# EAGLE board untitled (EAGLE 9.4.2)
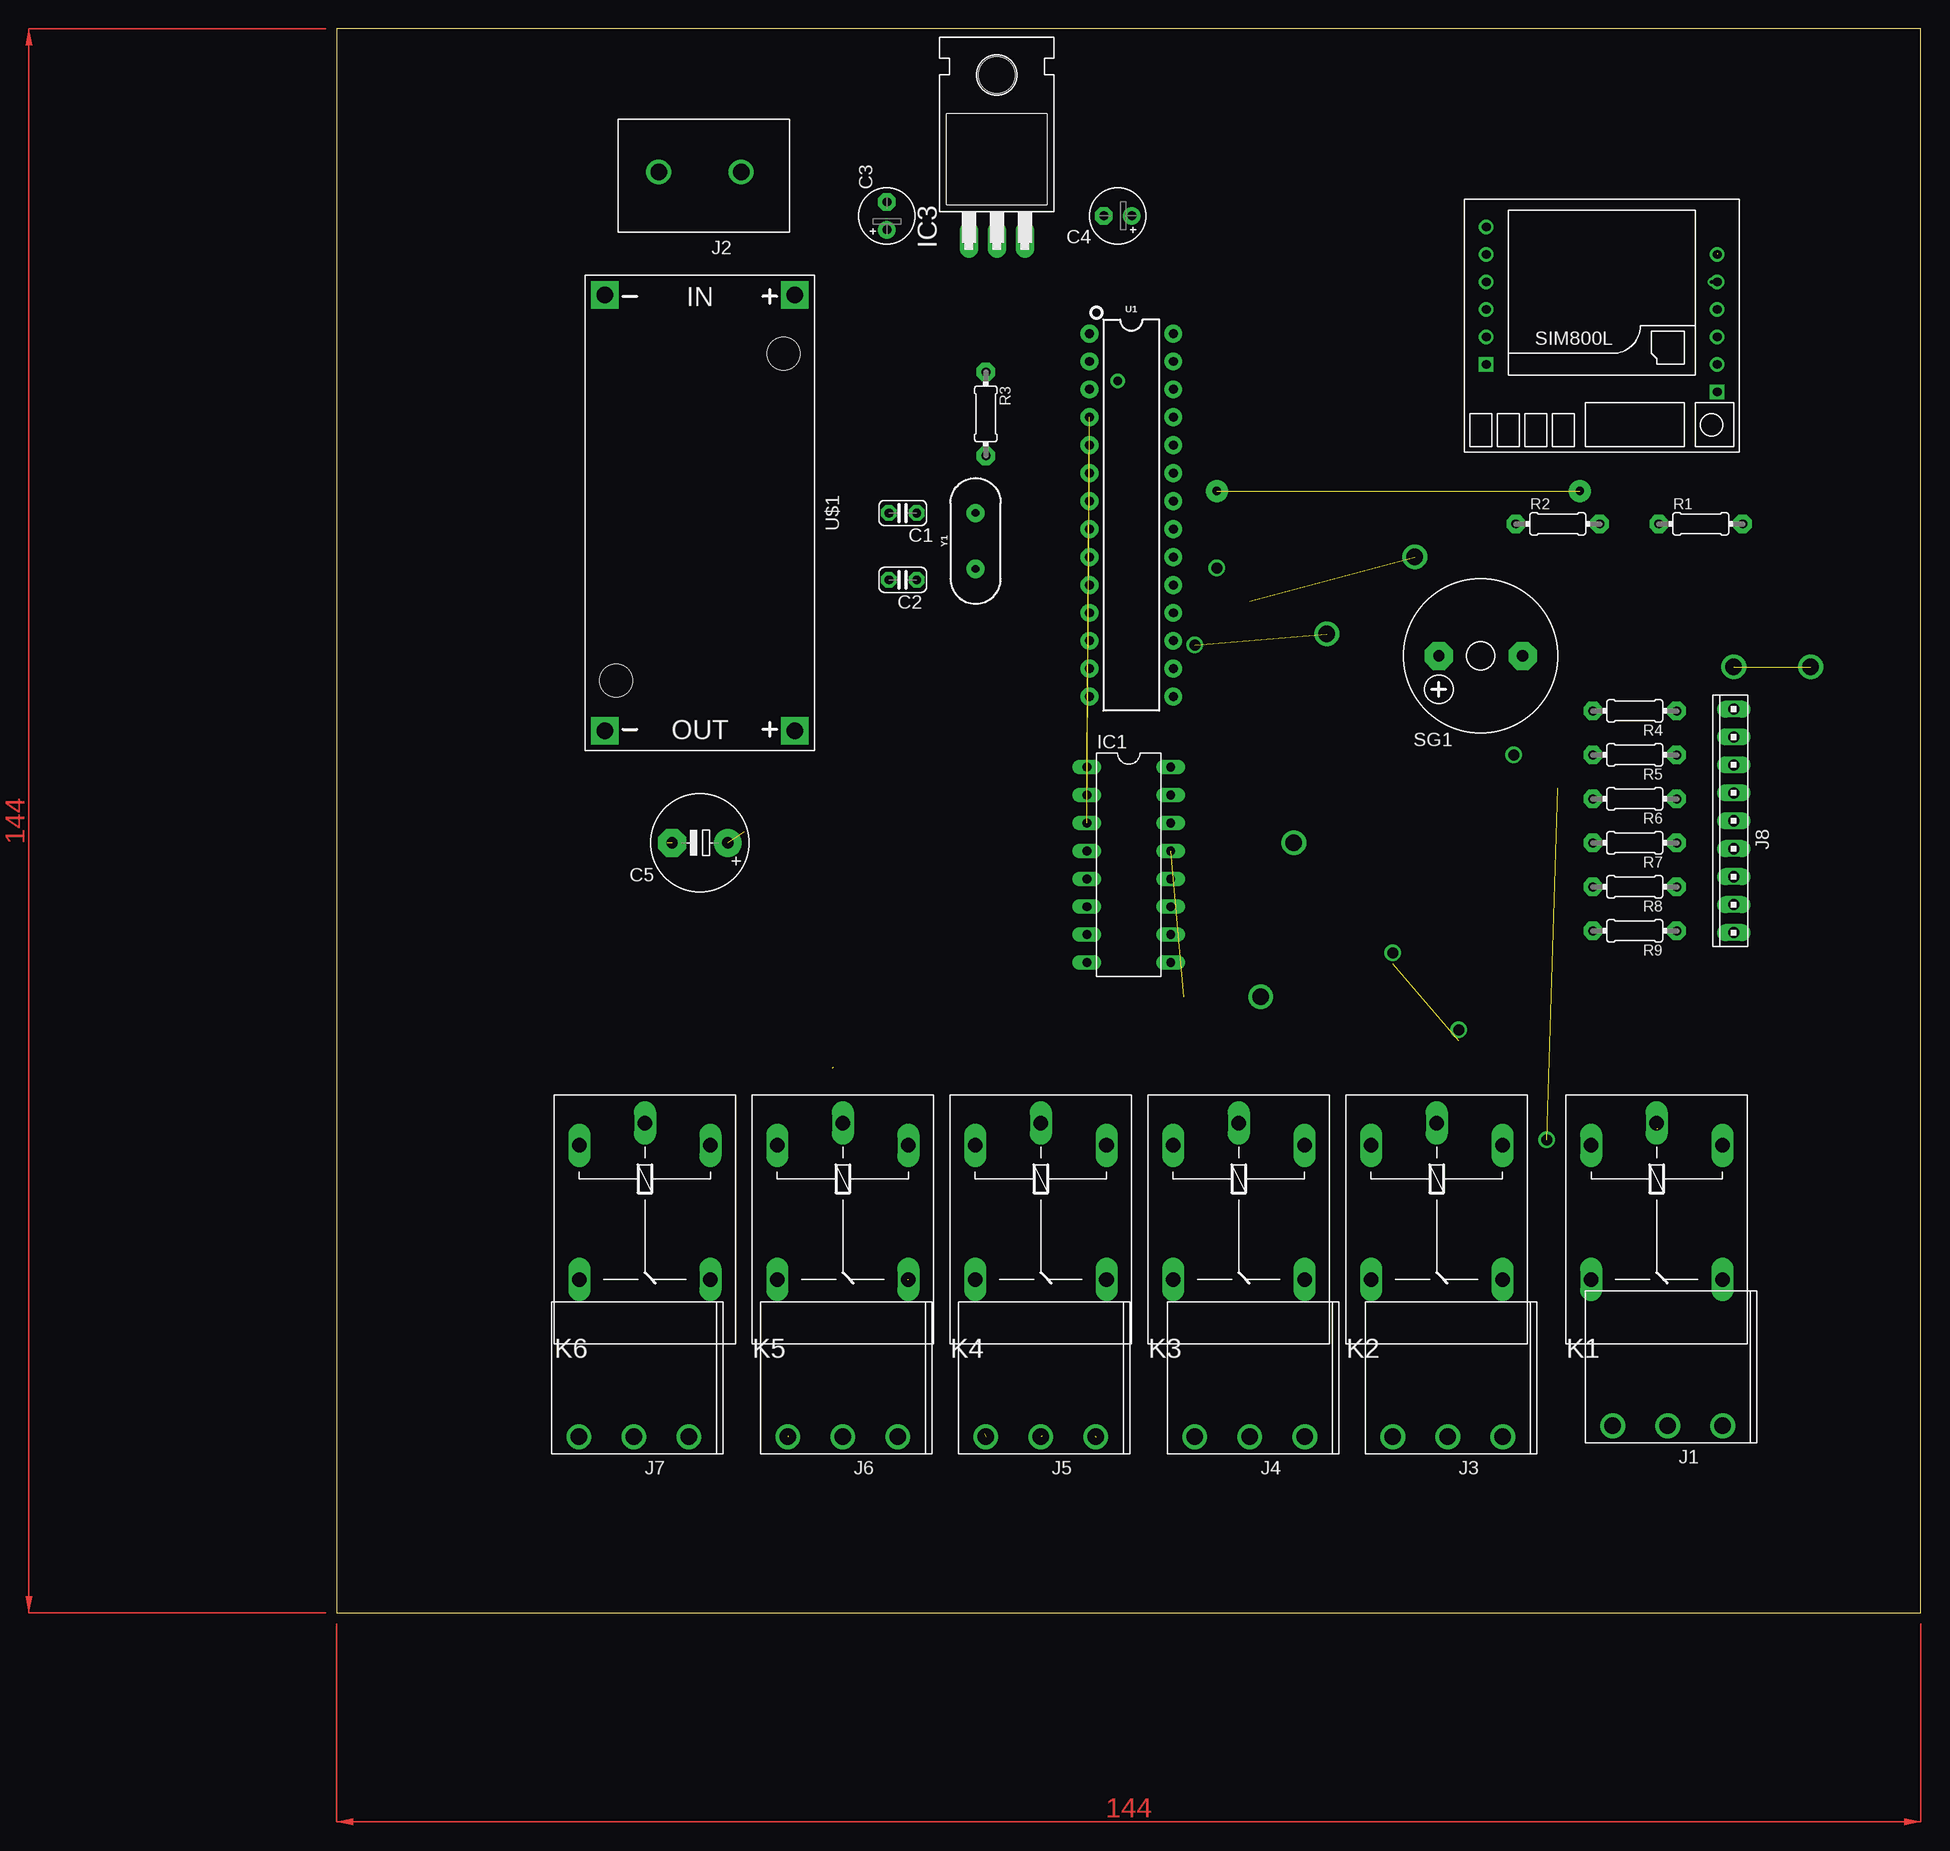
[diagram p0: board, top side]
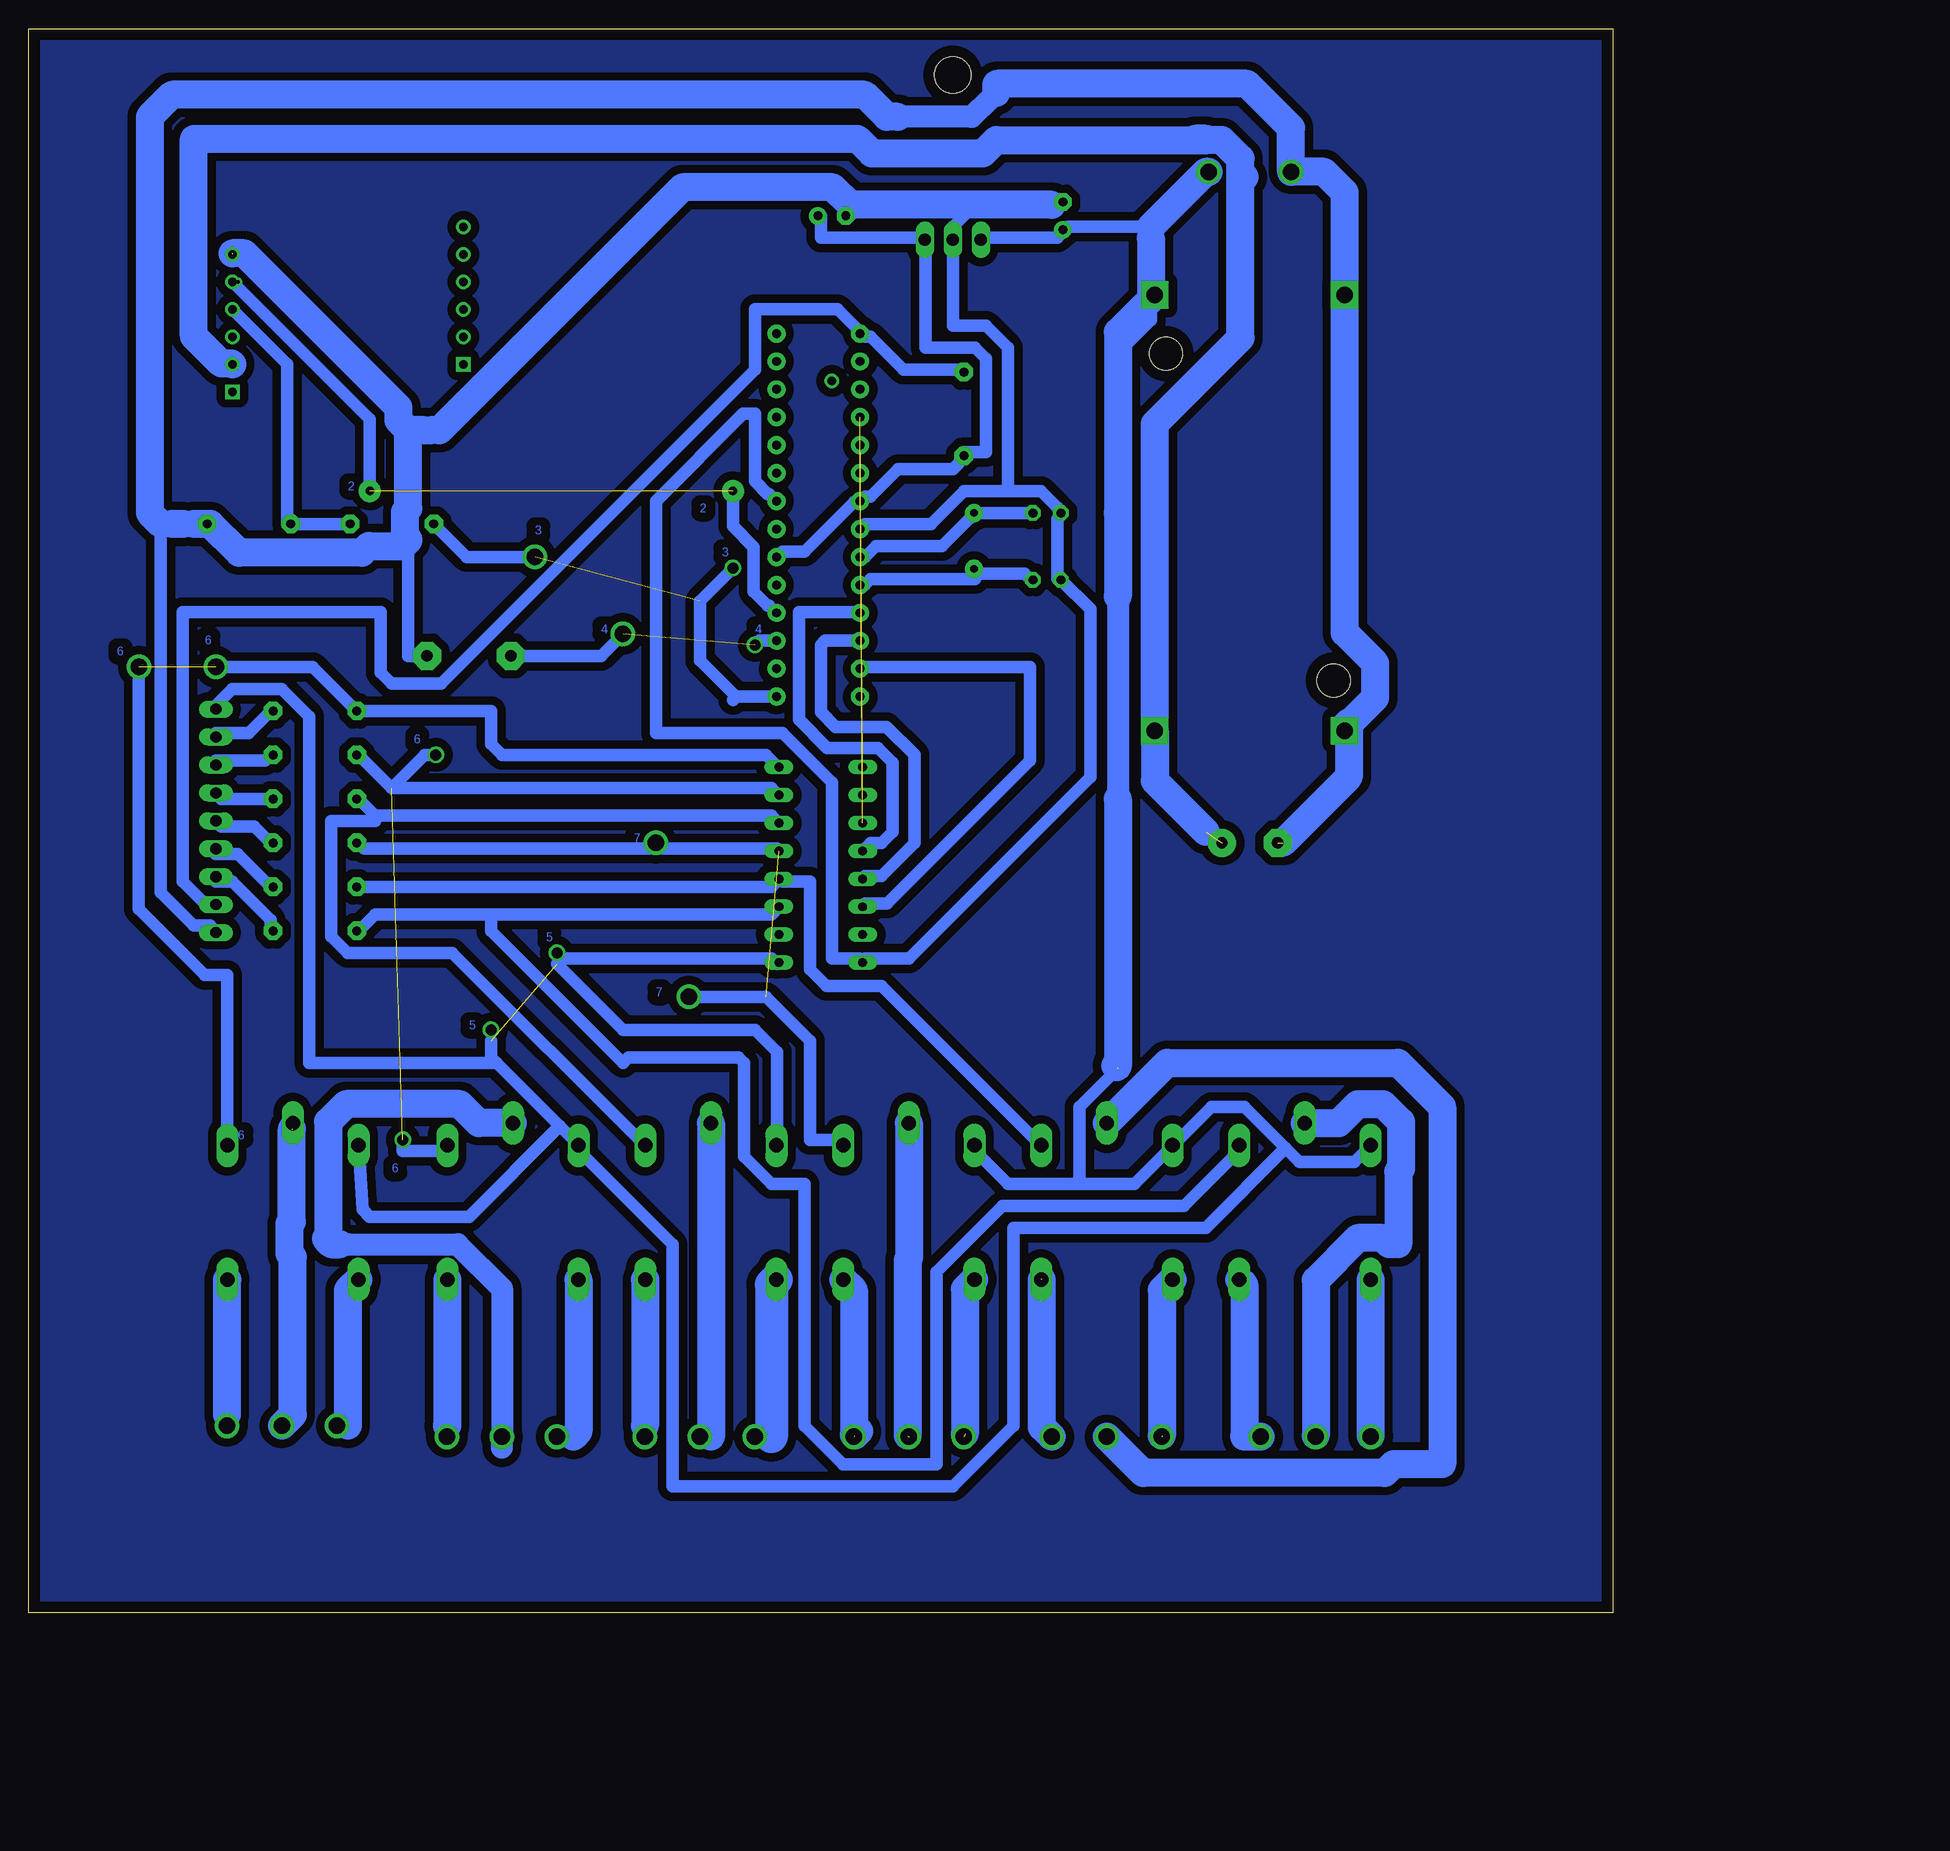
[diagram p1: board, bottom side, seen from below]

Size 144 x 144 mm. Coordinates in mm from the lower left corner, seen from the top.
Outline: 0,0 144,0 144,144 0,144 0,0
Copper layers (1*16): Top 0.035mm / dielectric 1.5mm / Bottom 0.035mm
Design rules "default *": minimum track width 45mil, minimum drill 0.35mm, track to track 30mil, track to pad 20mil, pad to pad 6mil, via to via 6mil, smd to smd 6mil, copper to edge 40mil, drill to drill 6mil, minimum pad ring 10mil, minimum via ring 8mil, stop-mask expansion 4mil, vias tented up to drill 0mil, thermal gap 10mil

## Footprints (pad centres in the part's own frame; a part is rotated, then mirrored left to right if it is on the bottom)
C025-024X044 = drill 0.813 pad 1.422 octagon: 1 -1.27,0; 2 1.27,0
E2,5-5 = drill 0.813 pad 1.6: + -1.27,0 | drill 0.813 pad 1.6 octagon: - 1.27,0
E5-8,5 = drill 1.016 pad 2.54: + -2.54,0 | drill 1.016 pad 2.54 octagon: - 2.54,0
DIL16 = drill 0.813 long: 1 -8.89,-3.81; 2 -6.35,-3.81; 3 -3.81,-3.81; 4 -1.27,-3.81; 5 1.27,-3.81; 6 3.81,-3.81; 7 6.35,-3.81; 8 8.89,-3.81; 9 8.89,3.81; 10 6.35,3.81; 11 3.81,3.81; 12 1.27,3.81; 13 -1.27,3.81; 14 -3.81,3.81; 15 -6.35,3.81; 16 -8.89,3.81
TO220H = drill 1.118 long: 1 -2.54,-10.16; 2 0,-10.16; 3 2.54,-10.16 | hole 3.302: 0,4.826
691216700003 = drill 1.5: 1 -5,0; 2 0,0; 3 5,0
691217910002 = drill 1.5: 1 -3.75,0; 2 3.75,0
10X09MTA = drill 1.016 long: 1 10.16,0; 2 7.62,0; 3 5.08,0; 4 2.54,0; 5 0,0; 6 -2.54,0; 7 -5.08,0; 8 -7.62,0; 9 -10.16,0
G5LE = drill 1.321 long: 1 -7.493,-5.969; 2 -7.493,5.969; O 4.699,5.969; P -9.525,0; S 4.699,-5.969
0204/7 = drill 0.813 pad 1.676 octagon: 1 -3.81,0; 2 3.81,0
F/CM12P = drill 1.016 pad 2.54 octagon: + 3.81,0; - -3.81,0
DIP28 = drill 0.813 pad 1.626: 1 -16.51,-3.81; 2 -13.97,-3.81; 3 -11.43,-3.81; 4 -8.89,-3.81; 5 -6.35,-3.81; 6 -3.81,-3.81; 7 -1.27,-3.81; 8 1.27,-3.81; 9 3.81,-3.81; 10 6.35,-3.81; 11 8.89,-3.81; 12 11.43,-3.81; 13 13.97,-3.81; 14 16.51,-3.81; 15 16.51,3.81; 16 13.97,3.81; 17 11.43,3.81; 18 8.89,3.81; 19 6.35,3.81; 20 3.81,3.81; 21 1.27,3.81; 22 -1.27,3.81; 23 -3.81,3.81; 24 -6.35,3.81; 25 -8.89,3.81; 26 -11.43,3.81; 27 -13.97,3.81; 28 -16.51,3.81
DC-DC-STEP-DOWN-LM2596 = drill 1.5 pad 2.5 square: IN+ -19.812,8.636; IN- -19.812,-8.636; OUT+ 19.812,8.636; OUT- 19.812,-8.636 | hole 3: -14.478,7.62; 15.24,-7.62
SIM800LMODULE = drill 0.8: DTR 10.5,1; GND -10.5,-6.5; MIC+ 10.5,-1.5; MIC- 10.5,-4; RST -10.5,1; RX -10.5,-1.5; SPK+ 10.5,-6.5; SPK- 10.5,-9; TX -10.5,-4; VCC -10.5,3.5 | drill 0.8 square: NET -10.5,6; RING 10.5,3.5
HC49US = drill 0.7 pad 1.651: 1 -2.54,0; 2 2.54,0

## Placement (x,y rotation side)
C1  [C025-024X044]  51.45,99.99 180 top
C2  [C025-024X044]  51.45,93.91 180 top
C3  [E2,5-5]  50,127 90 top
C4  [E2,5-5]  71,127 180 top
C5  [E5-8,5]  33,70 180 top
IC1  ULN2003AN  [DIL16]  72,68 270 top
IC3  7805T  [TO220H]  60,135 0 top
J1  [691216700003]  121,17 180 top
J2  [691217910002]  33,131 180 top
J3  [691216700003]  101,16 180 top
J4  [691216700003]  83,16 180 top
J5  [691216700003]  64,16 180 top
J6  [691216700003]  46,16 180 top
J7  [691216700003]  27,16 180 top
J8  [10X09MTA]  127,72 90 top
K1  G5L  [G5LE]  120,35 270 top
K2  G5L  [G5LE]  100,35 270 top
K3  G5L  [G5LE]  82,35 270 top
K4  G5L  [G5LE]  64,35 270 top
K5  G5L  [G5LE]  46,35 270 top
K6  G5L  [G5LE]  28,35 270 top
R1  [0204/7]  124,99 0 top
R2  [0204/7]  111,99 0 top
R3  [0204/7]  59,109 270 top
R4  [0204/7]  118,82 180 top
R5  [0204/7]  118,78 180 top
R6  [0204/7]  118,74 180 top
R7  [0204/7]  118,70 180 top
R8  [0204/7]  118,66 180 top
R9  [0204/7]  118,62 180 top
SG1  F/CM12P  [F/CM12P]  104,87 180 top
U1  328P  [DIP28]  72.23,99.8 270 top
U$1  DC-DC-STEP-DOWN-LM2596  [DC-DC-STEP-DOWN-LM2596]  33,100 270 top
U$2  SIM800LMODULE  [SIM800LMODULE]  115,117 180 top
Y1  16MHz  [HC49US]  58.07,97.45 90 top

## Library data of the parts
C1-C4 IC3 R1-R9 = adafruit
C5 = BeagleBone_Blue_R3
IC1 = uln-udn
J1-J7 = Wurth_Elektronik_Electromechanic_Terminal_Blocks_Connectors_rev19b
J8 = con-amp
K1-K6 = relay; OC_FARNELL: unknown; OC_NEWARK: unknown
SG1 = buzzer; OC_FARNELL: unknown; OC_NEWARK: unknown
U1 = SparkFun-IC-Microcontroller; PROD_ID: IC-09136
U$1 = diy-modules
U$2 = SIM800LMODULE
Y1 = SparkFun-Clocks; PROD_ID: XTAL-08181; SF_ID: COM-00536

## Nets
GND: C1.2 C2.2 C3.- C4.- C5.- IC1.8 IC3.2 J2.2 J8.9 R1.2 SG1.- U1.8 U1.22 U$1.IN- U$1.OUT- U$2.GND
N$1: IC1.1 U1.4
N$2: C2.1 U1.10 Y1.1
N$3: C1.1 U1.9 Y1.2
N$4: IC1.2 U1.5
N$5: IC1.3 U1.6
N$6: IC1.4 U1.11
N$7: IC1.5 U1.12
N$8: IC1.6 U1.13
N$10: IC1.15 K2.2 R5.2
N$11: C4.+ IC3.3 R3.2 U1.7 U1.20
N$12: J8.2 R4.1
N$13: IC1.14 K3.2 R6.2
N$14: IC1.13 K4.2 R7.2
N$15: C5.+ U$1.OUT+ U$2.VCC
N$16: U1.18 U$2.TX
N$17: R2.1 U1.15
N$18: R1.1 R2.2 U$2.RX
N$19: IC1.12 K5.2 R8.2
N$20: J1.2 K1.P
N$21: J1.3 K1.S
N$22: J1.1 K1.O
N$23: J8.3 R5.1
N$24: IC1.16 K1.2 R4.2
N$25: J3.2 K2.P
N$26: J3.3 K2.S
N$27: J3.1 K2.O
N$28: J8.8 R3.1 U1.1
N$29: J4.2 K3.P
N$30: J4.3 K3.S
N$31: J4.1 K3.O
N$32: SG1.+ U1.17
N$33: J5.2 K4.P
N$34: J5.3 K4.S
N$35: J5.1 K4.O
N$36: J8.4 R6.1
N$37: J6.2 K5.P
N$38: J6.3 K5.S
N$39: J6.1 K5.O
N$40: C3.+ IC1.9 IC3.1 J2.1 J8.1 K1.1 K2.1 K3.1 K4.1 K5.1 K6.1 U$1.IN+
N$41: J7.2 K6.P
N$42: J7.3 K6.S
N$43: J7.1 K6.O
N$45: J8.5 R7.1
N$46: J8.6 R8.1
N$47: J8.7 R9.1
N$64: IC1.11 K6.2 R9.2

## Tracks (layer width: path | path; a pad name or v marks a point on that pad's centre or on a via)
GND  (2 unrouted)
  Bottom 1.143: 58,128 51,128 50,128 C3.- | 58,128 60,126 IC3.2 60,117 57,117 55,115 55,102 | 68.75,127.75 68.5,128 58,128 | 68.75,127.75 69.5,127 C4.- | 55,102 52,102 50.5,100.5 C1.2 50.5,99.5 50.5,94 C2.2 47.5,91.23 47.5,76 64,59.5 68,59.5 IC1.8 68.5,59.5 71,59.5 71,75.5 75.5,80 87,80 87,101.07 79.07,109 78,109 78,102.89 76.82,101.72 76.69,101.72 U1.22 | 55,102 59,102 62,99 68,99 U1.8 | 24.5,120 U$1.IN- | 24.5,80 U$1.OUT- | 129,99 130,99 | 131,99 132,99 132,65.5 129,62.5 127.5,62.5 127,62 J8.9 | 109.5,97 109.5,87 SG1.- | 109.5,107.5 109.5,97 | 109.5,97 110,97 | 127.5,99 R1.2 | 69,128 68.75,127.75 | 107.5,107.5 108,107.5
  Bottom 1.27: 56.06,138.19 56.63,137.63
  Bottom 2: 56.63,137.63 58.26,136 65,136
  Bottom 2.54: 56.06,138.19 56.06,138.94 56,139 33.25,139 29.25,135 J2.2 26.25,131 24.36,129.11 U$1.IN- 24.36,89.1 21.59,86.33 21.59,83.19 24.36,80.42 U$1.OUT- 24.36,80.61 24,80.97 24,76 30,70 | 65,136 66,136 68,138 131,138 133,136 133,100 132,99 | 51,128 69,128 69.32,128 70.92,129.6 84.57,129.6 106.68,107.5 107.5,107.5 | 108,107.5 109.5,107.5 | 109.5,107.5 110.4,108.4 110.4,109.58 124.42,123.6 125.5,123.6 | 127.5,99 124.88,96.38 113.73,96.38 113.11,97 110,97 109.5,97.5 109.5,97.61 109.81,97.92 109.81,100.08 109.5,100.39 109.5,107.5 | 130,99 131,99 | R1.2 129,99
N$1  (1 unrouted)
N$2
  Bottom 1.143: 58,94.5 53.5,94.5 53,94 C2.1 | 58,94.5 Y1.1 | U1.10 68,93.5 67.5,94 58,94 58,94.5
N$3
  Bottom 1.143: C1.1 53,100 58,100 Y1.2 58.5,99.5 61,97 67,97 68,96 U1.9
N$4  (1 unrouted)
N$5  (1 unrouted)
N$6
  Bottom 1.143: IC1.4 68,69.5 67.5,70 66.5,70 65.5,71 65.5,77.32 66.81,78.63 71.44,78.63 74,81.19 74,91 68.51,91 U1.11
N$7
  Bottom 1.143: IC1.5 68,67 66.5,67 63.5,70 63.5,78.02 66.02,80.53 70.65,80.53 72,81.89 72,88 71.63,88.37 U1.12
N$8
  Bottom 1.143: IC1.6 68,64.5 66,64.5 53,77.5 53,86 68.25,86 U1.13
N$9  (via drill 0.75 pad 1.3)
  other vias: 71,112
N$10  (via drill 1)  (1 unrouted)
  Bottom 1.143: 111,75 76.5,75 76,74.5 IC1.15 | 111,75 114,78 R5.2 | 111,75 108,78 v107,78 | K2.2 106.46,42 110,42 v110,43
N$11
  Bottom 1.143: C4.+ 72,127 72,125 63,125 IC3.3 62.5,124.5 62.5,115 58,115 57,114 57,105.5 59,105.5 R3.2 59,105 60,104 65,104 67.5,101.5 68,101.5 U1.7 68.5,101 69,101 73.5,96.5 75.5,96.5 76,96 U1.20
N$12
  Bottom 1.143: J8.2 127,80 124,80 122,82 R4.1
N$13
  Bottom 1.143: IC1.14 76.5,72.5 112.5,72.5 | 112.5,72.5 114,74 R6.2 | K3.2 88,42.5 105.5,60 115,60 116.5,61.5 116.5,72 112.5,72 112.5,72.5
N$14  (via drill 1.5)  (1 unrouted)
  Bottom 1.143: IC1.13 76,69.5 113.5,69.5 114,70 R7.2 | K4.2 70.48,43 73,43 73,52 77,56 v84,56
N$15  (1 unrouted)
  Bottom 1.143: 35.5,70 C5.+
  Bottom 2.54: 33.85,130.93 33.85,115.9 41.64,108.11 U$1.OUT+ 41.64,75.64 37,71 | 33.46,130.54 33.85,130.93 | U$2.VCC 125.57,113.57 126.51,113.57 129,116.06 129,134 68.67,134 67.37,132.7 57.27,132.7 56.07,133.9 36.82,133.9 | 38,134 36.92,134 36.82,133.9 | 33.85,130.93 33.85,132.2 35.55,133.9 36.82,133.9
N$16  (via drill 0.75 pad 2)  (1 unrouted)
  Bottom 1.143: U1.18 76.69,91.56 76.82,91.56 78.09,92.83 78.09,96.91 80,98.81 v80,102 | U$2.TX 113,108.5 v113,102
N$17  (via drill 1, 1.5)  (1 unrouted)
  Bottom 1.143: U1.15 79.71,83.29 | 79.71,83.29 80,83 | 79.71,83.29 83,86.58 83,92 v80,95 | R2.1 104.19,96 v98,96
N$18
  Bottom 1.143: U$2.RX 120.5,113.5 120.5,99 R1.1 R2.2
N$19
  Bottom 1.143: R8.2 76.5,66 76,66.5 IC1.12 75.5,66.5 73,66.5 73,58.5 71.5,57 66.5,57 52,42.5 K5.2
N$20  (1 unrouted)
  Bottom 1.143: 120,44 K1.P
  Bottom 2.54: J1.2 120,18 120,32.33 120.3,32.63 120.3,35.37 120.1,35.57 120.1,44
N$21
  Bottom 1.143: 115,17 J1.3
  Bottom 2.54: K1.S 115,29.33 115,17
N$22
  Bottom 1.143: 126,18 J1.1
  Bottom 2.54: K1.O 126,30.27 126,18
N$23
  Bottom 1.143: J8.3 127,77.5 122.5,77.5 122,78 R5.1
N$24  (via drill 1, 1.5)  (1 unrouted)
  Bottom 1.143: IC1.16 76,77 77,78 101,78 102,79 102,82 R4.2 | 114,82 R4.2 | K1.2 125.97,57.97 126,58 128,58 134,64 v134,86 | R4.2 118.19,86 v127,86
N$25
  Bottom 1.143: 116.5,33.5 116.5,44 | 115,33.5 115.74,33.5
  Bottom 2: 115,33.5 105,33.5 101,29.5 J3.2 101,15
  Bottom 2.54: K2.P 103.09,44.52 104.82,46.25 115.18,46.25 116.8,44.63 116.8,34.2 117,34 116.5,33.5 115.74,33.5
N$26
  Bottom 1.143: 94.5,16 J3.3
  Bottom 2.54: K2.S 94.03,16.47 94.5,16
N$27
  Bottom 1.143: J3.1 106,17 106,30 K2.O
  Bottom 2.54: K2.O 105.97,17.03 106,17
N$28
  Bottom 1.143: J8.8 127,64.5 128,64.5 130,66.5 130,91 112,91 112,85.5 111,84.5 106.5,84.5 78,113 78,118.5 70.5,118.5 68.5,116.5 U1.1 68,116 67.5,116 64.5,113 59,113 R3.1
N$29
  Bottom 1.143: J4.2 82,16
  Bottom 2.54: K3.P 82,16
N$30
  Bottom 1.143: J4.3 76.5,16 76.5,30 K3.S
  Bottom 3: K3.S 76.5,29.83 76.5,16
N$31
  Bottom 1.143: J4.1 88,17 88,30 K3.O
  Bottom 2.54: K3.O 88,30.27 88,17
N$32  (via drill 1, 1.5)  (1 unrouted)
  Bottom 1.143: SG1.+ 92,87 v90,89 | U1.17 77.63,88.37 v78,88
N$33  (1 unrouted)
  Bottom 2.54: K4.P 64,32.18 64.1,32.08 64.1,16.1
N$34  (1 unrouted)
  Bottom 2.54: K4.S 58.9,29.44 58.9,16.29
N$35  (1 unrouted)
  Bottom 2.54: K4.O 69,29.33 69,16.18 68.92,16.1 68.51,16.51
N$36
  Bottom 1.143: R6.1 126.5,74 127,74.5 J8.4
N$37
  Bottom 1.143: 19.5,50 41,50 46,45 K5.P
  Bottom 2.54: K5.P 40.52,50 19.5,50 15.5,46 15.5,13.5 19.93,13.5 20.74,12.7 42.7,12.7 J6.2
N$38  (1 unrouted)
  Bottom 2.54: K5.S 41,29.33 41,16.1
N$39  (1 unrouted)
  Bottom 2.54: J6.1 51.9,16.9 51.9,30.3
N$40  (2 unrouted)
  Bottom 1.143: 101.5,50 118.5,50 118.5,81.5 121,84 125.5,84 127,82.5 J8.1 | 95.75,44.25 94,42.5 K2.1 94,42 85.5,33.5 85.5,11.5 60,11.5 54.5,17 54.5,35 37,35 29.75,42.25 | 95.75,44.25 101.5,50 | 95.75,44.25 104,36 113,36 113.67,36.66 K1.1 | IC3.1 57,125 50.5,125 50,125.5 C3.+ 49.5,126 42,126 42,125 42,120 U$1.IN+ 42,119.5 42,117.5 45,114.5 45,100 45,98 | IC1.9 76,59 76.5,59.5 95.5,59.5 96,59 90,53 78,53 76,51 76,42.5 K3.1 | 29.75,42.25 33.5,46 36.5,46 40,42.5 K5.1 40.5,42 43.5,39 48.5,39 | 29.75,42.25 28.5,41 23.5,41 22.5,42 K6.1 | 48.5,39 55,39 58,42 K4.1 58,43 | 45,49.5 48.5,46 48.5,39 | 101.5,50 102,50.5 102,52
  Bottom 2: 45,92.41 45,74
  Bottom 2.54: J2.1 37,131 42,126 | 42,125 42,119.5 | U$1.IN+ 45,116.45 45,100 45,92.41 | 45,74 45,49.68 45.09,49.59 45.25,49.75
N$41
  Bottom 1.143: 19.5,33.5 20,33.5 | 20,33.5
  Bottom 2.54: K6.P 24.91,44.52 23.18,46.25 20.88,46.25 19.26,44.63 19.26,40.36 19.5,40.12 19.5,33.5 | 20,33.5 20.32,33.5 20.88,34.06 23.18,34.06 27,30.24 27,16.1
N$42
  Bottom 2.54: K6.S 22.03,16.13 22,16.1
N$43
  Bottom 2.54: J7.1 33.5,16 | K6.O 33.5,29.83 33.5,16.1
N$45
  Bottom 1.143: J8.5 126.5,71.5 123.5,71.5 122,70 R7.1
N$46
  Bottom 1.143: J8.6 127,69 125,69 122,66 R8.1
N$47
  Bottom 1.143: J8.7 127,66.5 125.5,66.5 122,63 122,62 R9.1
N$48  (via drill 0.35)
  other vias: 125,121
N$49  (via drill 1)
  other vias: 96,60
N$50  (via drill 1)
  other vias: 102,53
N$51  (via drill 1.5)
  other vias: 87,70
N$52
  pour Bottom: 0,144 144,144 144,0 0,0
N$64
  Bottom 1.143: IC1.11 76.5,63.5 102,63.5 | 102,63.5 112.5,63.5 114,62 R9.2 | K6.2 34,42 39,37 55.5,37 61.5,31 61.5,13.5 70,13.5 73.5,17 73.5,39 76.5,39 79,41.5 79,50 79.5,50.5 89.5,50.5 90,50 102,62 102,63.5
(copper drawn outside any net)
  shapes: Top area x2

## Text on the board
Bottom: 2 | 2 | 3 | 3 | 4 | 4 | 6 | 6 | 6 | 7 | 5 | 7 | 5 | 6 | 6